# EAGLE board Relay_Bypass_v1.1 (EAGLE 8.1.0)
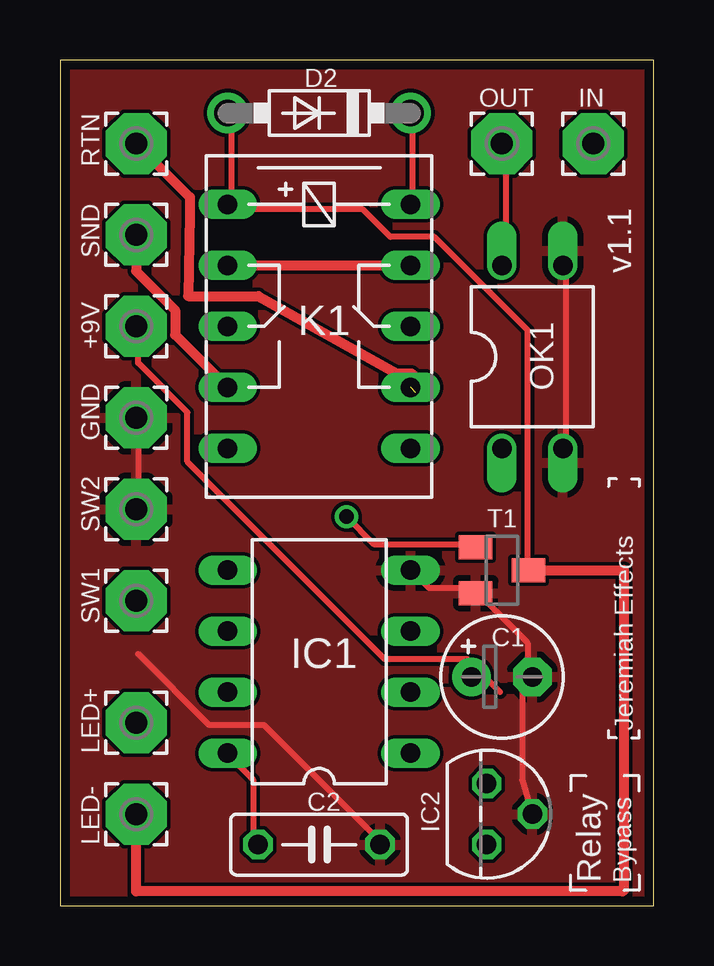
[diagram p0: board, top side]
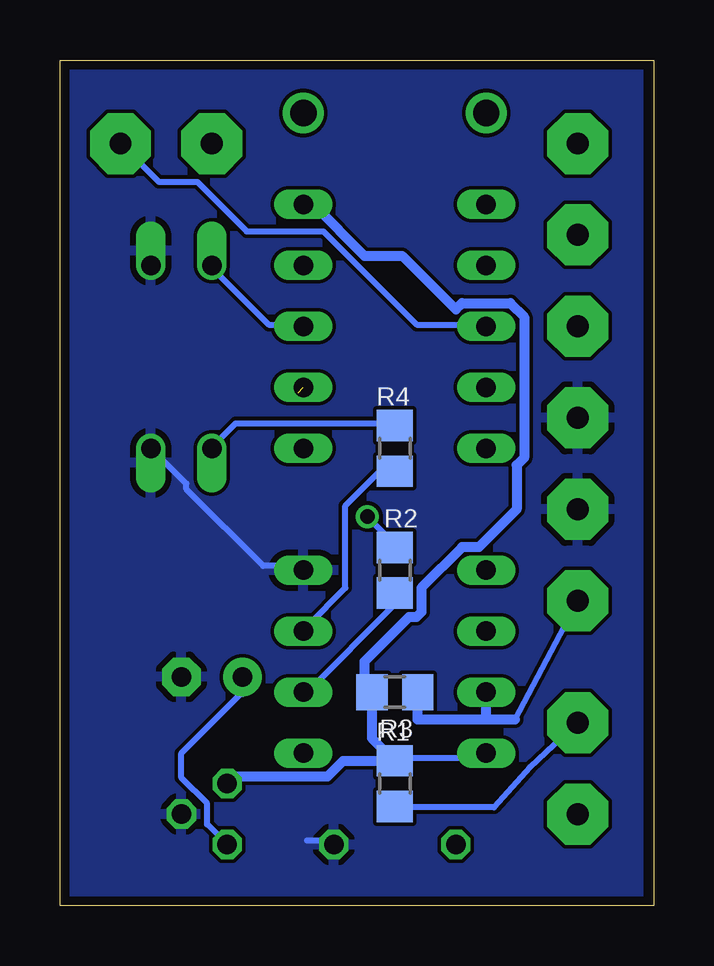
[diagram p1: board, bottom side, seen from below]

Size 24.74 x 35.23 mm. Coordinates in mm from the lower left corner, seen from the top.
Outline: 24.74,0 24.74,35.23 0,35.23 0,0 24.74,0
Copper layers (1*16): Top 0.0356mm / dielectric 1.5011mm / Bottom 0.0356mm
Design rules "LaenPCBOrder": minimum track width 6mil, minimum drill 13mil, track to track 6mil, track to pad 6mil, pad to pad 6mil, via to via 6mil, smd to smd 6mil, copper to edge 15mil, drill to drill 6mil, minimum pad ring 7mil, minimum via ring 7mil, stop-mask expansion 3mil, vias tented up to drill 0mil, thermal gap 10mil

## Footprints (pad centres in the part's own frame; a part is rotated, then mirrored left to right if it is on the bottom)
2,54/0,9 = drill 0.914 pad 2.54 octagon: 1 0,0
E2,5-5 = drill 0.813 pad 1.6: + -1.27,0 | drill 0.813 pad 1.6 octagon: - 1.27,0
C050-025X075 = drill 0.813 octagon: 1 -2.54,0; 2 2.54,0
DO41-7.6 = drill 1.1 pad 1.7: A 3.81,0; C -3.81,0
DIL08 = drill 0.813 long: 1 -3.81,-3.81; 2 -1.27,-3.81; 3 1.27,-3.81; 4 3.81,-3.81; 5 3.81,3.81; 6 1.27,3.81; 7 -1.27,3.81; 8 -3.81,3.81
TO92 = drill 0.813 octagon: 1 -1.27,0; 2 0,1.905; 3 1.27,0
G6H2-100 = drill 0.813 long: 1 -5.08,-3.81; 5 5.08,-3.81; 6 5.08,3.81; 10 -5.08,3.81; O1 -2.54,-3.81; O2 -2.54,3.81; P1 0,-3.81; P2 0,3.81; S1 2.54,-3.81; S2 2.54,3.81
DIL04 = drill 0.813 offset: 1 -1.27,-3.81; 2 1.27,-3.81; 3 1.27,3.81; 4 -1.27,3.81
R0805 = smd 1.3 x 1.5: 1 -0.95,0; 2 0.95,0
SOT23 = smd 1 x 1.4: 1 -0.95,-1.1; 2 0.95,-1.1; 3 0,1.1

## Placement (x,y rotation side)
+9V  [2,54/0,9]  3.17,24.13 0 top
C1  100uF  [E2,5-5]  18.41,9.52 0 top
C2  100n  [C050-025X075]  10.79,2.54 0 top
D2  1N5817-B  [DO41-7.6]  10.79,33.02 180 top
GND  [2,54/0,9]  3.17,20.32 0 top
IC1  TINY15LP  [DIL08]  10.79,10.16 90 top
IC2  78L05Z  [TO92]  17.78,3.81 270 top
IN  [2,54/0,9]  22.22,31.75 0 top
K1  G6H2-100  [G6H2-100]  10.79,24.13 270 top
LED+  [2,54/0,9]  3.17,7.62 0 top
LED-  [2,54/0,9]  3.17,3.81 0 top
OK1  LTV816  [DIL04]  19.68,22.86 0 top
OUT  [2,54/0,9]  18.41,31.75 0 top
R1  10k  [R0805]  10.79,8.89 180 bottom
R2  10k  [R0805]  10.79,13.97 270 bottom
R3  clr  [R0805]  10.79,5.08 270 bottom
R4  1k  [R0805]  10.79,19.05 270 bottom
RTN  [2,54/0,9]  3.17,31.75 0 top
SND  [2,54/0,9]  3.17,27.94 0 top
SW1  [2,54/0,9]  3.17,12.7 0 top
SW2  [2,54/0,9]  3.17,16.51 0 top
T1  BC849  [SOT23]  18.41,13.97 270 top

## Library data of the parts
+9V GND IN LED+ LED- OUT RTN SND SW1 SW2 = wirepad
C1 C2 R1-R4 = rcl
D2 = diode
IC1 = atmel; OC_FARNELL: unknown; OC_NEWARK: unknown
IC2 = linear
K1 = relay; OC_FARNELL: unknown; OC_NEWARK: unknown
OK1 = optocoupler; OC_FARNELL: unknown; OC_NEWARK: unknown
T1 = transistor-neu-to92

## Nets
GND: C1.- C2.2 GND.1 IC1.4 IC2.2 OK1.2 OK1.3 SW2.1 T1.2
N$1: IC1.7 R1.1 SW1.1
N$2: +9V.1 C1.+ IC2.3
N$3: OK1.1 R4.1
N$4: K1.P2 OK1.4 OUT.1
N$5: IN.1 K1.P1
N$6: K1.O1 K1.O2
N$7: K1.S2 RTN.1
N$9: IC1.2 R2.2
N$10: IC1.3 R4.2
N$11: R2.1 T1.1
N$12: D2.A K1.1 LED-.1 T1.3
N$13: K1.S1 SND.1
N$15: LED+.1 R3.2
VCC: C2.1 D2.C IC1.8 IC2.1 K1.10 R1.2 R3.1

## Tracks (layer width: path | path; a pad name or v marks a point on that pad's centre or on a via)
GND
  Top 0.254: GND.1 3.25,20.32 3.25,16.66 SW2.1 3.25,16.43 | OK1.2 21.08,19.18 21.08,26.49 OK1.3 | IC1.4 14.68,13.92 15.37,13.23 17.2,13.23 T1.2 17.42,13 19.48,10.95 19.48,10.26 C1.- 19.48,10.03 19.25,9.8 19.25,5.23 IC2.2 | 3.25,10.49 6.22,7.52 8.51,7.52 13.31,2.72 C2.2
  Bottom 0.254: 14.45,2.72 13.54,2.72 C2.2 | OK1.2 19.48,17.58 19.48,17.35 16.28,14.15 14.68,14.15 IC1.4
  pour Top: 0.64,35.56 24.76,35.56 24.76,34.29 24.76,0 0.64,0
  pour Bottom: 0.64,35.56 24.76,35.56 24.76,0 0.64,0
N$1
  Bottom 0.254: SW1.1 5.79,7.75
  Bottom 0.406: 5.79,7.75 6.99,7.75 | 6.99,7.75 IC1.7 | 6.99,7.75 9.85,7.75 R1.1
N$2
  Top 0.254: 18.34,8.89 17.2,10.03 C1.+ 16.97,10.26 13.54,10.26 5.31,18.49 5.31,20.55 3.25,22.61 3.25,23.98 +9V.1
  Bottom 0.254: IC2.3 18.62,3.38 18.62,4.25 19.68,5.32 19.68,6.35 17.14,8.89
  Bottom 0.406: 17.14,8.89 C1.+
N$3
  Bottom 0.254: R4.1 10.79,20.09 17.42,20.09 18.34,19.18 OK1.1
N$4
  Top 0.254: OK1.4 18.57,26.72 18.57,31.75 OUT.1
  Bottom 0.254: K1.P2 14.68,24.21 16.05,24.21 18.34,26.49 OK1.4
N$5
  Bottom 0.254: IN.1 20.62,30.15 19.02,30.15 16.97,28.09 13.77,28.09 9.88,24.21 7.14,24.21 K1.P1
N$6
  Top 0.406: K1.O1 K1.O2
N$7  (1 unrouted)
  Top 0.406: 14.82,21.38 14.94,21.49 14.94,21.89 14.65,22.17 14.02,22.17 8.27,25.39 5.34,25.39 5.41,28.81 5.41,29.52 RTN.1
N$9
  Bottom 0.254: R2.2 10.79,12.55 14.45,8.89 IC1.2
N$10
  Bottom 0.254: R4.2 10.79,18.03 11.48,18.03 12.85,16.66 12.85,13.23 14.45,11.63 IC1.3
N$11  (via drill 0.61)
  Top 0.254: v11.94,16.21 13.08,15.06 17.2,15.06 T1.1
  Bottom 0.254: v11.94,16.21 10.79,15.06 R2.1
N$12
  Top 0.254: D2.A 7.14,32.89 7.14,29.23 K1.1 7.14,29.01 12.62,29.01 13.77,27.86 15.6,27.86 19.48,23.98 19.48,14.15 T1.3
  Top 0.406: T1.3 23.49,13.97 23.49,0.63 23.44,0.58 3.17,0.58 LED-.1
N$13
  Top 0.254: K1.S1 7.14,21.69
  Top 0.406: K1.S1 4.8,23.77 4.8,24.8 3.17,26.43 SND.1
N$15
  Bottom 0.254: R3.2 10.79,4.09 6.66,4.09 5.16,5.77 LED+.1
VCC
  Top 0.254: C2.1 8.05,2.72 8.05,5.23 7.14,6.15 IC1.8 | K1.10 14.68,29.23 14.68,32.89 D2.C
  Bottom 0.254: R3.1 10.79,6.15 7.14,6.15 IC1.8
  Bottom 0.406: IC2.1 17.47,5.38 13.6,5.38 12.95,6.03 R3.1 11.75,6.98 R1.2 12.06,9.21 12.06,10.16 10.21,12.01 9.9,12.01 9.69,12.22 9.69,13.24 7.99,14.94 7.29,14.94 5.71,16.51 5.71,18.35 5.41,18.65 5.41,24.53 5.98,25.1 7.99,25.1 8.26,24.84 10.49,27.07 12.06,27.07 14.2,29.21 K1.10

## Text on the board
tNames: v1.1 | Jeremiah Effects | Relay | Bypass